# EAGLE board CT_schematic (EAGLE 7.6.0)

Size 100 x 80 mm. Coordinates in mm from the lower left corner, seen from the top.
Outline: 0,0 100,0 100,80 0,80 0,0
Copper layers (1*16): Top 0.035mm / dielectric 1.5mm / Bottom 0.035mm
Design rules "default": minimum track width 10mil, minimum drill 24mil, track to track 8mil, track to pad 8mil, pad to pad 8mil, via to via 8mil, smd to smd 8mil, copper to edge 40mil, drill to drill 8mil, minimum pad ring 10mil, minimum via ring 8mil, stop-mask expansion 4mil, vias tented up to drill 0mil, thermal gap 10mil

## Footprints (pad centres in the part's own frame; a part is rotated, then mirrored left to right if it is on the bottom)
C0603 = smd 0.8 x 0.8: 1 -0.762,0; 2 0.762,0
C0402 = smd 0.5 x 0.5: 1 -0.508,0; 2 0.508,0
EXV-9B = smd 2.718 x 1.778: 1 -2.108,0; 2 2.108,0
C1206 = smd 1.3 x 1.6: 1 -1.524,0; 2 1.524,0
L0603 = smd 0.8 x 0.8: 1 -0.762,0; 2 0.762,0
R0603 = smd 0.8 x 0.8: 1 -0.762,0; 2 0.762,0
WLCSP49 = smd 0.25 x 0.25: A1 -1.2,1.2; A2 -0.8,1.2; A3 -0.4,1.2; A4 0,1.2; A5 0.4,1.2; A6 0.8,1.2; A7 1.2,1.2; B1 -1.2,0.8; B2 -0.8,0.8; B3 -0.4,0.8; B4 0,0.8; B5 0.4,0.8; B6 0.8,0.8; B7 1.2,0.8; C1 -1.2,0.4; C2 -0.8,0.4; C3 -0.4,0.4; C4 0,0.4; C5 0.4,0.4; C6 0.8,0.4; C7 1.2,0.4; D1 -1.2,0; D2 -0.8,0; D3 -0.4,0; D4 0,0; D5 0.4,0; D6 0.8,0; D7 1.2,0; E1 -1.2,-0.4; E2 -0.8,-0.4; E3 -0.4,-0.4; E4 0,-0.4; E5 0.4,-0.4; E6 0.8,-0.4; E7 1.2,-0.4; F1 -1.2,-0.8; F2 -0.8,-0.8; F3 -0.4,-0.8; F4 0,-0.8; F5 0.4,-0.8; F6 0.8,-0.8; F7 1.2,-0.8; G1 -1.2,-1.2; G2 -0.8,-1.2; G3 -0.4,-1.2; G4 0,-1.2; G5 0.4,-1.2; G6 0.8,-1.2; G7 1.2,-1.2
SOIC-8 = smd 1.6 x 0.6: 1 -2.7,1.905 | smd 1.55 x 0.6: 2 -2.7,0.635; 3 -2.7,-0.635; 4 -2.7,-1.905; 5 2.7,-1.905; 6 2.7,-0.635; 7 2.7,0.635; 8 2.7,1.905
LGA14R35P5X6_200X200X100 = smd 0.35 x 0.15: 1 -0.8,0.525; 2 -0.8,0.175; 3 -0.8,-0.175; 4 -0.8,-0.525; 8 0.8,-0.525; 9 0.8,-0.175; 10 0.8,0.175; 11 0.8,0.525 | smd 0.15 x 0.35: 5 -0.35,-0.8; 6 0,-0.8; 7 0.35,-0.8; 12 0.35,0.8; 13 0,0.8; 14 -0.35,0.8
ABS07-32.768KHZ-7-T = smd 1.1 x 2.4: 1 -2.5,0; 2 0,0
ABLS-25.000MHZ-B2F-T = smd 5.6 x 2.8: 1 -3.81,0; 2 5.69,0
LP2954 = smd 1.6 x 0.6: 1 -2.475,1.905 | smd 1.55 x 0.6: 2 -2.475,0.635; 3 -2.475,-0.635; 4 -2.475,-1.905; 5 2.475,-1.905; 6 2.475,-0.635; 7 2.475,0.635; 8 2.475,1.905
DFN8_2X3MC = smd 0.813 x 0.305: 1 -1.398,0.75; 2 -1.398,0.25; 3 -1.398,-0.25; 4 -1.398,-0.75; 5 1.398,-0.75; 6 1.398,-0.25; 7 1.398,0.25; 8 1.398,0.75 | smd 1.753 x 1.549: 9 0,0
JST-2-SMD = smd 1 x 4.6: 1 -1,-3.7; 2 1,-3.7 | smd 1.6 x 3.4: NC1 -3.4,1.5; NC2 3.4,1.5
FCI_10118193-0001LF = smd 0.4 x 1.35: 1 -1.3,2.675; 2 -0.65,2.675; 3 0,2.675; 4 0.65,2.675; 5 1.3,2.675 | smd 1.6 x 1.4: 6 -3.2,2.45; 7 3.2,2.45 | smd 1.9 x 1.9: 8 -1.2,0; 9 1.2,0 | hole 0.5: -3.3,0; 3.3,0
SON-6 = smd 0.55 x 0.3: 1 -0.355,0.5 | smd 0.52 x 0.3: 2 -0.37,0; 3 -0.37,-0.5; 4 0.37,-0.5; 5 0.37,0; 6 0.37,0.5
SW_4-1437565-2 = smd 1.4 x 2.1: 1 -2.23,4.55; 2 -2.23,-4.55; 3 2.23,4.55; 4 2.23,-4.55
LGM67K-G1J2-24-Z = smd 0.8 x 1.4: A -2,0; C 0,0
NC7SZ125M5X = smd 1.3 x 0.7: 1 -1.3,0.95; 2 -1.3,0; 3 -1.3,-0.95; 4 1.3,-0.95; 5 1.3,0.95

## Placement (x,y rotation side)
C1  1e-07  [C0603]  -38.1,52.07 0 top  (outside the outline)
C2  1e-07  [C0603]  -41.91,52.07 0 top  (outside the outline)
C3  1e-07  [C0603]  -45.72,52.07 0 top  (outside the outline)
C4  1e-07  [C0603]  -49.53,52.07 0 top  (outside the outline)
C5  4.7e-06  [C0603]  -34.29,52.07 0 top  (outside the outline)
C6  1e-07  [C0603]  -53.34,52.07 0 top  (outside the outline)
C7  1e-08  [C0603]  -57.15,52.07 0 top  (outside the outline)
C8  1e-06  [C0603]  -15.24,57.15 0 top  (outside the outline)
C9  1e-11  [C0402]  -45.72,57.15 0 top  (outside the outline)
C10  1e-11  [C0402]  -49.53,57.15 0 top  (outside the outline)
C11  1e-11  [C0402]  -53.34,57.15 0 top  (outside the outline)
C12  1e-11  [C0402]  -57.15,57.15 0 top  (outside the outline)
C13  1e-08  [C0402]  -15.24,62.23 0 top  (outside the outline)
C14  1e-07  [C0402]  -19.05,62.23 0 top  (outside the outline)
C15  1e-07  [C0402]  -22.86,62.23 0 top  (outside the outline)
C16  1e-06  [EXV-9B]  -24.13,40.64 0 top  (outside the outline)
C17  2.2e-06  [EXV-9B]  -33.02,40.64 0 top  (outside the outline)
C18  1e-07  [C0402]  -26.67,62.23 0 top  (outside the outline)
C19  1e-05  [C1206]  -57.15,33.02 0 top  (outside the outline)
C20  1e-05  [C1206]  -16.51,40.64 0 top  (outside the outline)
C21  1e-08  [C0402]  -30.48,62.23 0 top  (outside the outline)
F1  240.0  [L0603]  -19.05,57.15 0 top  (outside the outline)
R1  10000.0  [R0603]  -25.4,46.99 0 top  (outside the outline)
R2  1000.0  [R0603]  -22.86,57.15 0 top  (outside the outline)
R3  910.0  [R0603]  -26.67,57.15 0 top  (outside the outline)
R4  4700.0  [R0603]  -30.48,57.15 0 top  (outside the outline)
R5  2200.0  [R0603]  -34.29,57.15 0 top  (outside the outline)
R6  2200.0  [R0603]  -38.1,57.15 0 top  (outside the outline)
R7  10000.0  [R0603]  -30.48,46.99 0 top  (outside the outline)
R8  10000.0  [R0603]  -35.56,46.99 0 top  (outside the outline)
R9  10000.0  [R0603]  -40.64,46.99 0 top  (outside the outline)
R10  10000.0  [R0603]  -45.72,46.99 0 top  (outside the outline)
R11  10000.0  [R0603]  -50.8,46.99 0 top  (outside the outline)
R12  100000.0  [R0603]  -46.99,40.64 0 top  (outside the outline)
R13  100000.0  [R0603]  -52.07,40.64 0 top  (outside the outline)
R14  47000.0  [R0603]  -55.88,46.99 0 top  (outside the outline)
R15  100000.0  [R0603]  -57.15,40.64 0 top  (outside the outline)
R16  10000.0  [R0603]  -15.24,52.07 0 top  (outside the outline)
R17  10000.0  [R0603]  -20.32,52.07 0 top  (outside the outline)
R18  82000.0  [R0603]  -25.4,52.07 0 top  (outside the outline)
R19  300000.0  [R0603]  -15.24,46.99 0 top  (outside the outline)
R20  120000.0  [R0603]  -20.32,46.99 0 top  (outside the outline)
R21  2000.0  [R0603]  -41.91,57.15 0 top  (outside the outline)
R22  10000.0  [R0603]  -30.48,52.07 0 top  (outside the outline)
U1  STM32L071CZY6  [WLCSP49]  -45.72,26.67 0 top  (outside the outline)
U2  AT25320B-SSHL-T  [SOIC-8]  -41.91,17.78 0 top  (outside the outline)
U3  BMC150  [LGA14R35P5X6_200X200X100]  -52.07,34.29 0 top  (outside the outline)
U4  ABS07-32.768KHZ-7-T  [ABS07-32.768KHZ-7-T]  -27.94,34.29 0 top  (outside the outline)
U5  ABLS-25.000MHZ-B2F-T  [ABLS-25.000MHZ-B2F-T]  -26.67,26.67 0 top  (outside the outline)
U6  LP2954AIMX/NOPB  [LP2954]  -25.4,17.78 0 top  (outside the outline)
U7  MCP73831T-2ACI/MC  [DFN8_2X3MC]  -39.37,60.96 0 top  (outside the outline)
U8  S2B-PH-SM4-TB(LF)(SN)  [JST-2-SMD]  -41.91,6.35 0 top  (outside the outline)
U9  10118193-0001LF  [FCI_10118193-0001LF]  -52.07,16.51 0 top  (outside the outline)
U10  TPS3895ADRYR  [SON-6]  -33.02,60.96 0 top  (outside the outline)
U11  4-1437565-2  [SW_4-1437565-2]  -27.94,6.35 0 top  (outside the outline)
U12  Q65110A2395  [LGM67K-G1J2-24-Z]  -36.83,34.29 0 top  (outside the outline)
U13  nc7sz125m5x  [NC7SZ125M5X]  -40.64,40.64 0 top  (outside the outline)

## Library data of the parts
C1-C21 F1 R1-R22 U1-U13 = circuit_tree

## Nets
CLK_CRYSTAL_U1_C6: C9.1 U1.C6 U4.1
CLK_CRYSTAL_U1_C7: C10.1 U1.C7 U4.2
CLK_CRYSTAL_U1_D6: C11.1 U1.D6 U5.1
CLK_CRYSTAL_U1_D7: C12.1 U1.D7 U5.2
GND: C1.2 C2.2 C3.2 C4.2 C5.2 C6.2 C7.2 C8.2 C9.2 C10.2 C11.2 C12.2 C13.2 C14.2 C15.2 C16.2 C17.2 C18.2 C19.2 C20.2 C21.2 R2.2 R7.2 R15.2 R18.2 R20.2 R21.2 U1.D4 U2.4 U3.1 U3.6 U3.7 U3.9 U6.4 U7.6 U7.9 U8.2 U9.5 U9.6 U9.7 U9.8 U9.9 U10.2 U12.C U13.1 U13.3
INPUT_USBPOWER_5V: C19.1 R22.2 U7.1 U7.2 U9.1
NET_U1_A5: R7.1 U1.A5
NET_U1_A6: R6.1 U1.A6 U3.14
NET_U1_B4: R5.1 U1.B4 U3.11
NET_U1_D5: R4.1 U1.D5 U13.4
NET_U1_F7: C7.1 C8.1 F1.1 U1.E6 U1.F7
NET_U1_G6: R3.1 U1.G6 U12.A
NET_U1_G7: R1.1 U1.G7 U11.3 U11.4
NET_U2_3: R8.1 U2.3
NET_U2_7: R10.1 U2.7
NET_U6_3: R13.1 U6.3
NET_U6_5: R12.1 U6.5
NET_U6_7: R14.2 R15.1 U6.7
NET_U7_5: R22.1 U7.5
NET_U7_8: R21.1 U7.8
NET_U10_1: R17.1 R18.1 U10.1
NET_U10_3: R19.2 R20.1 U10.3
NET_U10_4: R16.1 U10.4 U13.2
NET_U11_1: R2.1 U11.1 U11.2
PROC_SPI1_MISO: U1.B3 U2.2
PROC_SPI1_MOSI: U1.A4 U2.5
PROC_SPI1_NSS: R9.1 U1.A2 U2.1
PROC_SPI1_SCK: U1.A3 U2.6
VCC_S1_3V7: C16.1 C20.1 R13.2 U6.8 U7.3 U7.4 U8.1
VCC_TIER1_1V8: C1.1 C2.1 C3.1 C4.1 C5.1 C6.1 C13.1 C14.1 C15.1 C17.1 C18.1 C21.1 F1.2 R1.2 R3.2 R4.2 R5.2 R6.2 R8.2 R9.2 R10.2 R11.1 R11.2 R12.2 R14.1 R16.2 R17.2 R19.1 U1.A1 U1.A7 U1.B6 U1.G2 U2.8 U3.8 U3.10 U3.12 U3.13 U6.1 U10.6 U13.5

## Tracks (layer width: path | path; a pad name or v marks a point on that pad's centre or on a via)
CLK_CRYSTAL_U1_C6  (2 unrouted)
CLK_CRYSTAL_U1_C7  (2 unrouted)
CLK_CRYSTAL_U1_D6  (2 unrouted)
CLK_CRYSTAL_U1_D7  (2 unrouted)
GND  (45 unrouted)
INPUT_USBPOWER_5V  (4 unrouted)
NET_U1_A5  (1 unrouted)
NET_U1_A6  (2 unrouted)
NET_U1_B4  (2 unrouted)
NET_U1_D5  (2 unrouted)
NET_U1_F7  (4 unrouted)
NET_U1_G6  (2 unrouted)
NET_U1_G7  (3 unrouted)
NET_U2_3  (1 unrouted)
NET_U2_7  (1 unrouted)
NET_U6_3  (1 unrouted)
NET_U6_5  (1 unrouted)
NET_U6_7  (2 unrouted)
NET_U7_5  (1 unrouted)
NET_U7_8  (1 unrouted)
NET_U10_1  (2 unrouted)
NET_U10_3  (2 unrouted)
NET_U10_4  (2 unrouted)
NET_U11_1  (2 unrouted)
PROC_SPI1_MISO  (1 unrouted)
PROC_SPI1_MOSI  (1 unrouted)
PROC_SPI1_NSS  (2 unrouted)
PROC_SPI1_SCK  (1 unrouted)
VCC_S1_3V7  (6 unrouted)
VCC_TIER1_1V8  (39 unrouted)